# EAGLE board AudioJackIO_Small (EAGLE 9.6.1)
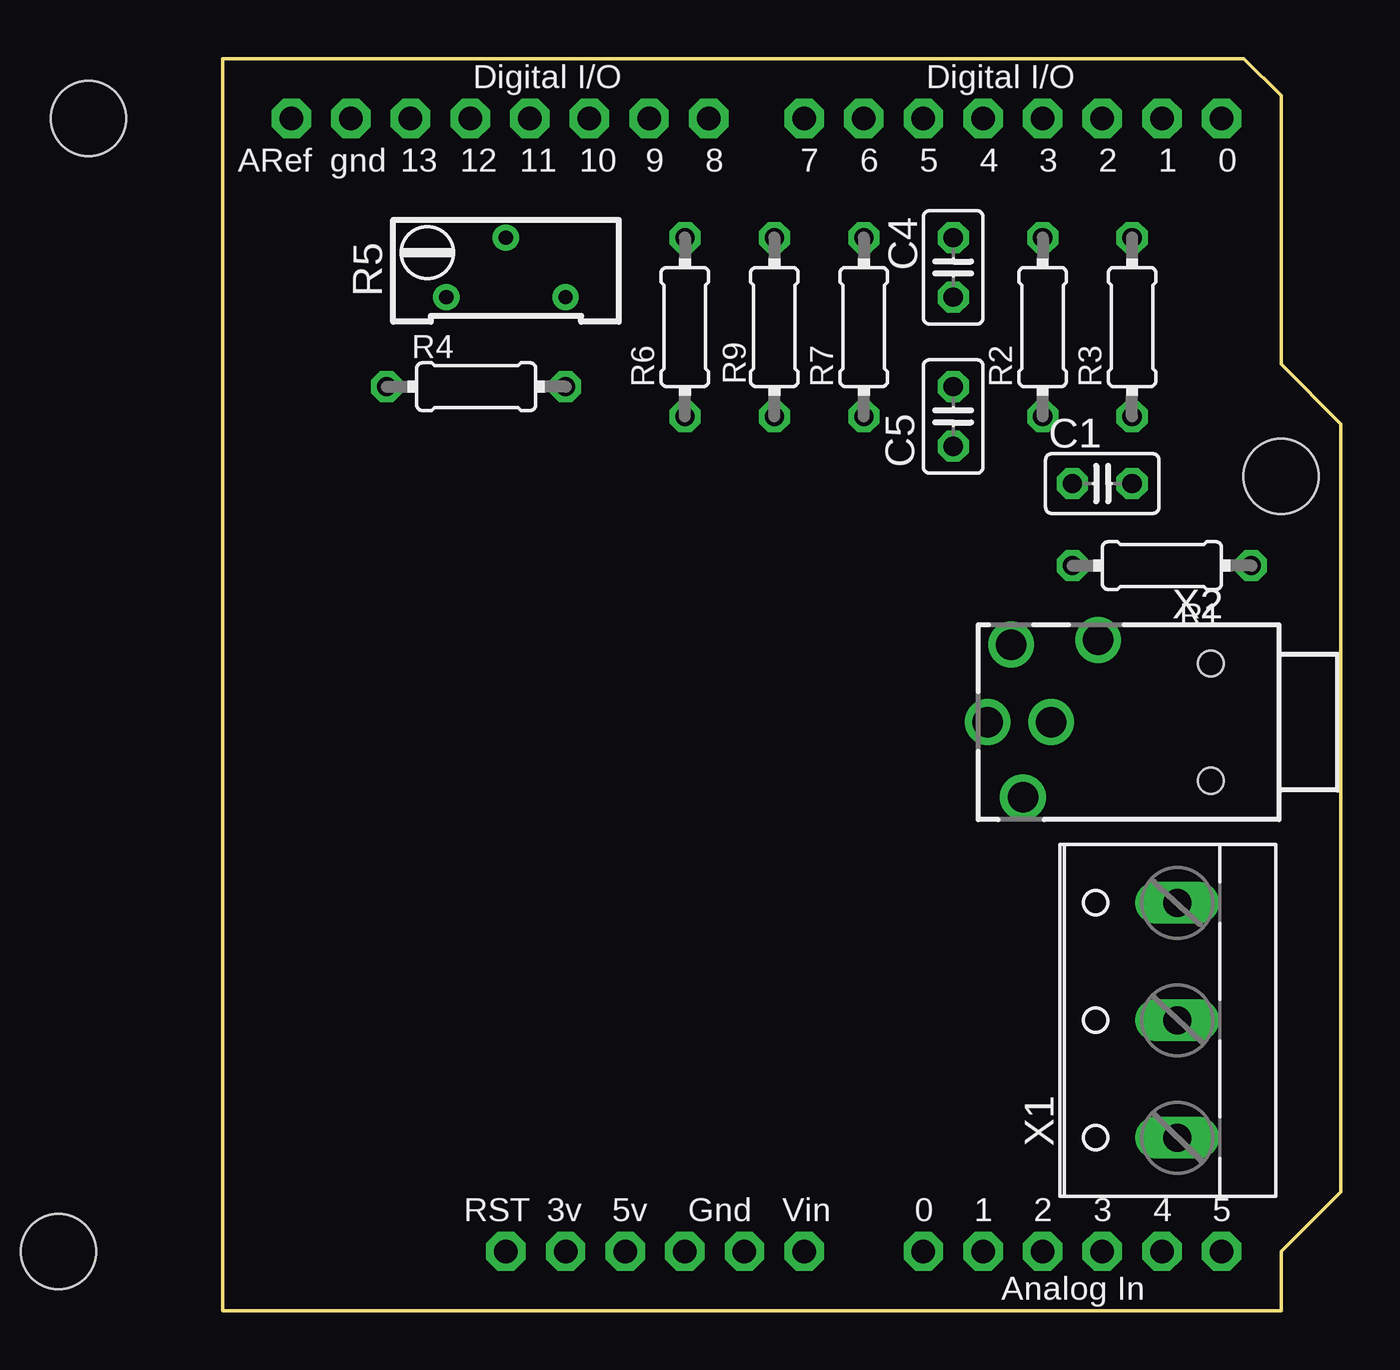
[diagram p0: board, top side]
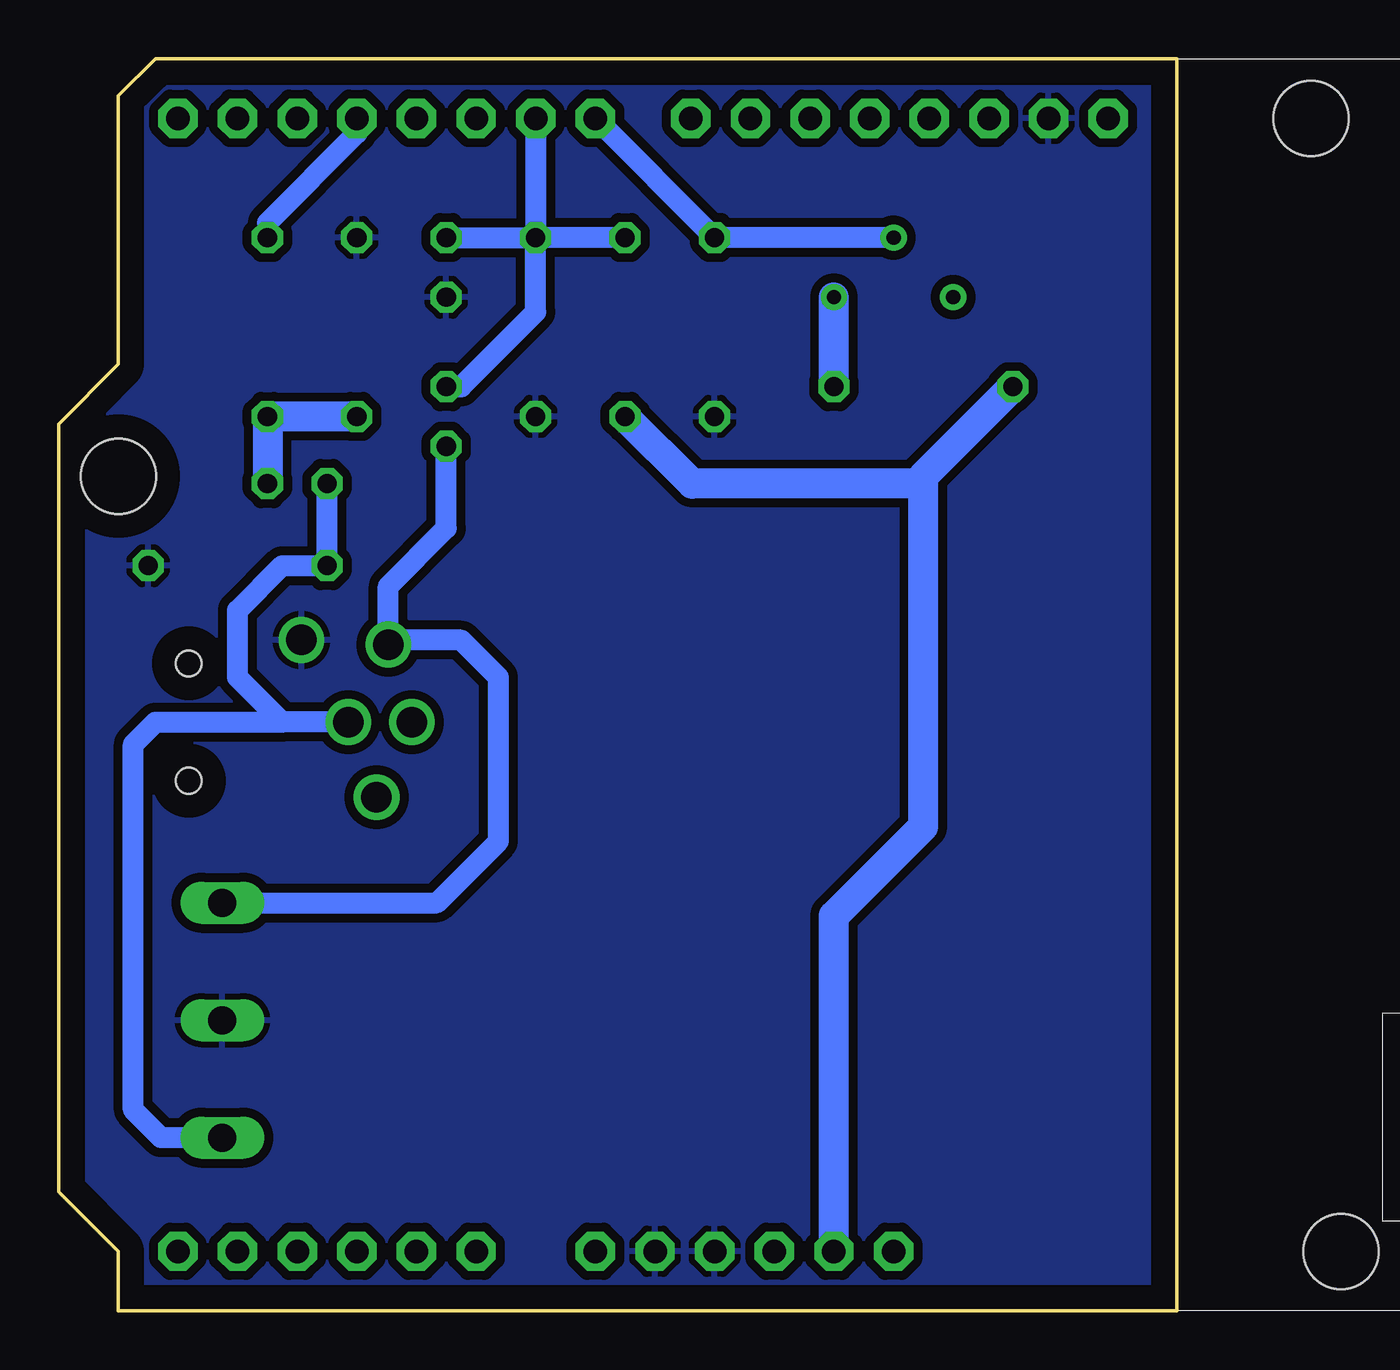
[diagram p1: board, bottom side, seen from below]

Size 47.62 x 53.34 mm. Coordinates in mm from the lower left corner, seen from the top.
Outline: 45.09,0 45.09,2.54 47.62,5.08 47.62,37.78 45.09,40.32 45.09,51.75 43.5,53.34 0,53.34 0,0 45.09,0
Copper layers (1*16): Top 0.035mm / dielectric 1.5mm / Bottom 0.035mm
Design rules "default *": minimum track width 15mil, minimum drill 0.35mm, track to track 15mil, track to pad 15mil, pad to pad 15mil, via to via 15mil, smd to smd 15mil, copper to edge 40mil, drill to drill 6mil, minimum pad ring 10mil, minimum via ring 8mil, stop-mask expansion 4mil, vias tented up to drill 0mil, thermal gap 10mil
Net classes: 1 POWER: width 1.27 mm; 2 Signal: width 0.889 mm

## Footprints (pad centres in the part's own frame; a part is rotated, then mirrored left to right if it is on the bottom)
C025-025X050 = drill 0.813 octagon: 1 -1.27,0; 2 1.27,0
0204/7 = drill 0.813 octagon: 1 -3.81,0; 2 3.81,0
RTRIM64Y = drill 0.61: 1 0,-2.54; 2 -2.54,0; 3 0,2.54
ARDUINO-BPLACE = drill 1 pad 1.676 octagon: 3V 35.56,2.54; 5V 38.1,2.54; A0 50.8,2.54; A1 53.34,2.54; A2 55.88,2.54; A3 58.42,2.54; A4 60.96,2.54; A5 63.5,2.54; AREF 23.876,50.8; D0 63.5,50.8; D1 60.96,50.8; D2 58.42,50.8; D3 55.88,50.8; D4 53.34,50.8; D5 50.8,50.8; D6 48.26,50.8; D7 45.72,50.8; D8 41.656,50.8; D9 39.116,50.8; D10 36.576,50.8; D11 34.036,50.8; D12 31.496,50.8; D13 28.956,50.8; GND 26.416,50.8; GND1 43.18,2.54; GND2 40.64,2.54; RESET 33.02,2.54; VIN 45.72,2.54 | hole 3.2: 15.24,50.8; 66.04,35.56; 13.97,2.54
W237-103 = drill 1.194 long: 1 -5,-1.29; 2 0,-1.29; 3 5,-1.29
1503_10 = drill 1.3 pad 1.9: 1 -3.5,-7.8; 2 0,-9.8; 3 -3.3,-11.5; 4 3.2,-11; 5 0,-12.5 | hole 1.1: -2.5,-3; 2.5,-3

## Placement (x,y rotation side)
C1  0.1uF  [C025-025X050]  37.47,35.24 0 top
C4  67pF  [C025-025X050]  31.11,44.45 90 top
C5  0.1uF  [C025-025X050]  31.11,38.1 270 top
R1  2k  [0204/7]  40.01,31.75 180 top
R2  2K  [0204/7]  34.92,41.91 90 top
R3  10K  [0204/7]  38.73,41.91 90 top
R4  5K  [0204/7]  10.79,39.37 180 top
R5  10K  [RTRIM64Y]  12.06,43.18 270 top
R6  10K  [0204/7]  19.68,41.91 90 top
R7  100K  [0204/7]  27.3,41.91 90 top
R9  100K  [0204/7]  23.5,41.91 270 top
U$1  ARDUINO-BPLACE  [ARDUINO-BPLACE]  -20.95,0 0 top
X1  [W237-103]  39.37,12.38 90 top
X2  1503_10  [1503_10]  45.09,25.08 270 top

## Library data of the parts
C1 C4 C5 = rcl; SPICEPREFIX: C
R1-R4 R6 R7 R9 = rcl; SPICEPREFIX: R
R5 = rcl; SPICEMODEL: X; SPICEPREFIXL: POT
U$1 = adafruit
X1 = con-wago-500; MPN: 237-103; OC_FARNELL: unknown; OC_NEWARK: 18M7116
X2 = con-lumberg; OC_FARNELL: 1308868; OC_NEWARK: unknown

## Nets
+5V [POWER]: U$1.5V
AUDIO_IN [Signal]: C5.2 X1.3 X2.3
AUDIO_OUT [Signal]: C1.1 R1.2 X1.1 X2.2
GND [POWER]: C4.1 R1.1 R2.2 R6.1 R7.1 U$1.GND U$1.GND1 U$1.GND2 X1.2 X2.1
N$1 [Signal]: C1.2 R2.1 R3.1
N$3 [Signal]: R4.1 R5.3
PIN3 [Signal]: R3.2 U$1.D3
PIN6 [Signal]: C4.2 C5.1 R7.2 R9.1 U$1.D6
PIN7 [Signal]: R5.2 R6.2 U$1.D7
V+ [POWER]: U$1.VIN
VCC [POWER]: R4.2 R9.2 U$1.3V

## Tracks (layer width: path | path; a pad name or v marks a point on that pad's centre or on a via)
AUDIO_IN
  Bottom 0.889: C5.2 31.11,33.34 33.59,30.87 X2.3 33.39,28.57 30.48,28.57 28.89,26.99 28.89,20 31.51,17.38 X1.3
AUDIO_OUT
  Bottom 0.889: C1.1 R1.2 38.1,31.75 40.01,29.84 40.01,26.99 38.1,25.08 | X2.2 38.1,25.08 | X1.1 43.26,7.38 44.45,8.57 44.45,24.13 43.5,25.08 38.1,25.08
GND
  pour Bottom: 0.64,52.7 0.64,0.64 44.45,0.64 44.45,2.86 46.99,5.4 46.99,37.47 44.45,40.01 44.45,51.44 43.18,52.7
N$1
  Bottom 1.27: R2.1 R3.1 C1.2
N$3
  Bottom 1.27: R4.1 R5.3
PIN3
  Bottom 0.889: U$1.D3 34.92,50.16 38.73,46.35 R3.2
PIN6
  Bottom 0.889: R9.1 R7.2 | C4.2 R7.2 | U$1.D6 R7.2 | C5.1 30.48,39.37 27.3,42.55 R7.2
PIN7
  Bottom 0.889: R5.2 R6.2 U$1.D7
VCC
  Bottom 1.27: R4.2 10.79,35.56 10.79,35.24 | 10.79,35.24 20.64,35.24 R9.2 | U$1.3V 14.61,16.83 10.79,20.64 10.79,35.24